# Altium PCB AtMega8.PcbDoc
Units mm, origin at the board's own origin, x right, y up, seen from the top; angles counter-clockwise.
Board outline 35 x 20 mm, 2 copper layers (Top Layer, Bottom Layer); 4 components, 10 nets, 46 pads, 0 vias.
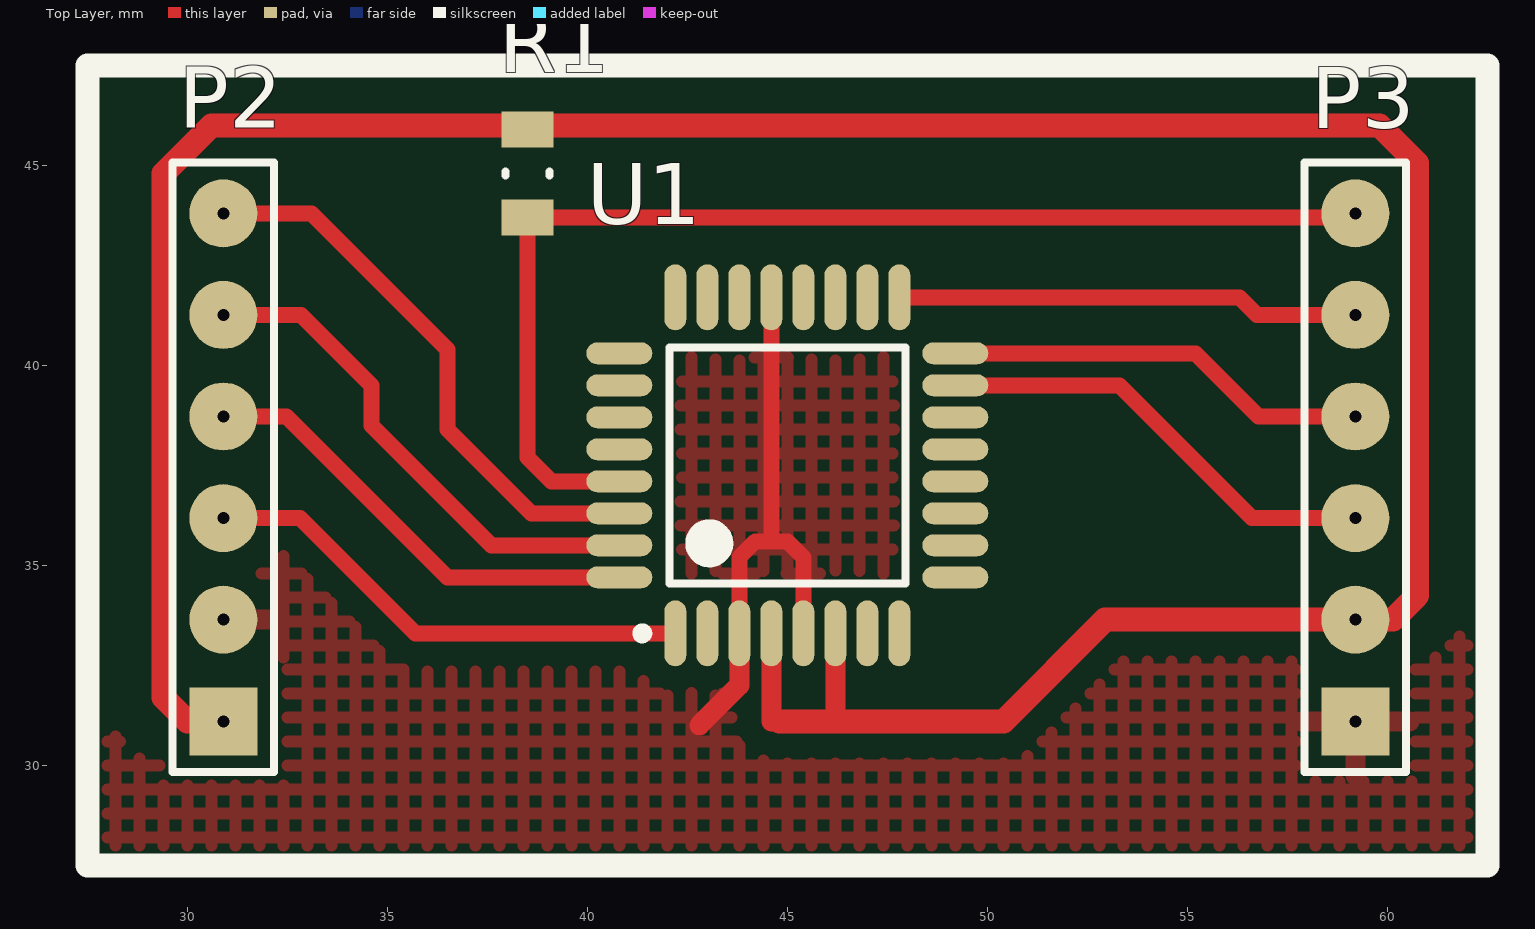
[diagram p0: Top Layer view]
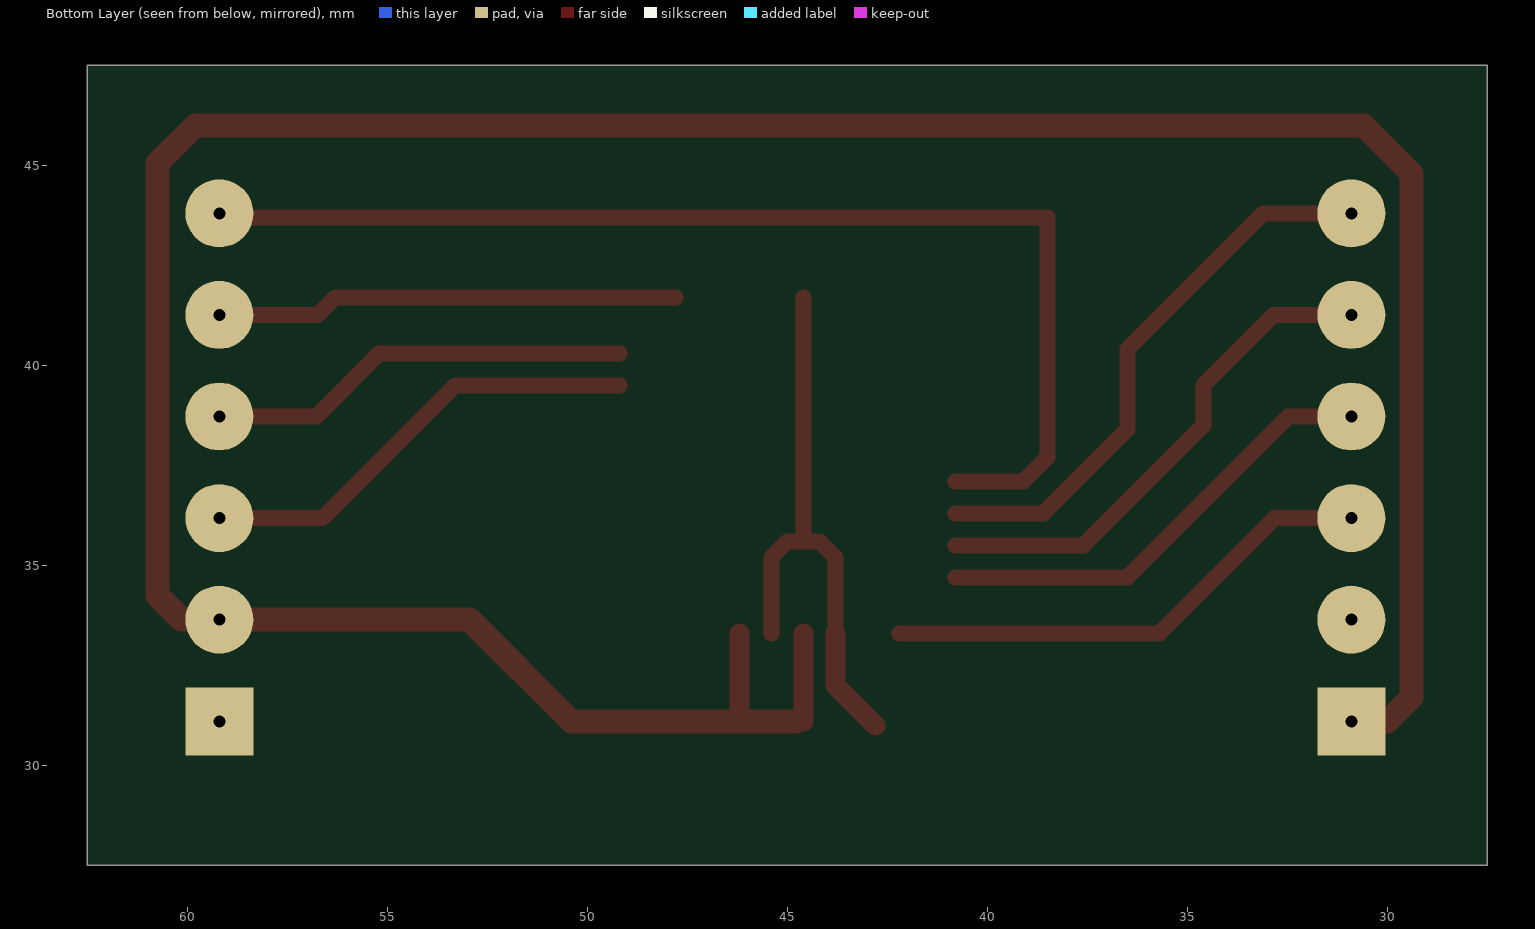
[diagram p1: Bottom Layer view, seen from below]

## Layer stack, top to bottom
Top Solder: solder mask 0.0102, Solder Resist, Dk 3.5
Top Layer: signal copper 0.0356
Dielectric 1: dielectric 0.32, FR-4, Dk 4.8
Bottom Layer: signal copper 0.0356
Bottom Solder: solder mask 0.0102, Solder Resist, Dk 3.5

## Board outline
27.5,27.5 62.5,27.5 62.5,47.5 27.5,47.5

## Design rules (kind name [scope] priority, off if disabled: settings)
Clearance Clearance_1 [InPolygon] p1: gap=0.6
Clearance [All] p2: gap=0.254
PolygonConnect [All] p1: connectstyle=Relief reliefconductorwidth=0.5 reliefentries=4 polygonreliefangle="90 Angle" airgapwidth=0.5
RoutingVias [All] p1: holewidth=0.711 width=1.27 viastyle="Through Hole" minholewidth=0.711 minwidth=1.27 maxholewidth=0.711 maxwidth=1.27
SolderMaskExpansion [All] p1: expansion=0.102
Width [All] p1: maxlimit=0.4 minlimit=0.254 preferedwidth=0.4
30 further rules are at their usual default settings.

## Components (designator, comment, footprint, x,y, rotation, side; value= is the part's Value field where it differs from the comment)
P2 "Header 6" HDR1X6 30.9,31.1 r90 top
P3 "SPI" HDR1X6 59.2,31.1 r90 top
R1 "Resistor" RESC(0805)2112X05N_wave 38.5,44.8 r90 top
U1 "ATmega8-16AU" 32A_N 45,37.5 r90 top

## Footprints (in the part's own frame and the unit in brackets; to place one, negate y for a bottom-side part, rotate by r counter-clockwise, add the part's x,y. Pads: shape width x height; smd on the part's side, far side on the other; paste and mask are expansions set on the pad)
32A_N [mm] "Thin QFP, 32-Leads, Body 7x7mm, Pitch 0.8mm, IPC Medium Density"
  oval 1.65x0.55 smd: 1(-4.2,2.8) 2(-4.2,2) 3(-4.2,1.2) 4(-4.2,0.4) 5(-4.2,-0.4) 6(-4.2,-1.2) 7(-4.2,-2) 8(-4.2,-2.8) 17(4.2,-2.8) 18(4.2,-2) 19(4.2,-1.2) 20(4.2,-0.4) 21(4.2,0.4) 22(4.2,1.2) 23(4.2,2) 24(4.2,2.8)
  oval 0.55x1.65 smd: 9(-2.8,-4.2) 10(-2,-4.2) 11(-1.2,-4.2) 12(-0.4,-4.2) 13(0.4,-4.2) 14(1.2,-4.2) 15(2,-4.2) 16(2.8,-4.2) 25(2.8,4.2) 26(2,4.2) 27(1.2,4.2) 28(0.4,4.2) 29(-0.4,4.2) 30(-1.2,4.2) 31(-2,4.2) 32(-2.8,4.2)
  silkscreen extent -4.32,-2.95 2.95,3.75, body extent -3.5,-3.5 3.5,3.5, height 1.2
HDR1X6 [mm] "Connector; Header; 6 Position"
  rect 1.7x1.7 hole 0.3: 1(0,0)
  round 1.7 hole 0.3: 2(2.54,0) 3(5.08,0) 4(7.62,0) 5(10.16,0) 6(12.7,0)
  silkscreen extent -1.27,-1.27 13.97,1.27
RESC(0805)2112X05N_wave [mm] "Chip Diode, 2-Leads, Body 2,05x1,25mm, IPC Medium Density"
  rect 0.9x1.3 smd: 1(-1.1,0) 2(1.1,0)
  silkscreen extent -0.05,-0.55 0.05,0.55, body extent -1,-0.61 1,0.61, height 0.5

## Part data
P2: "Header, 6-Pin"
P3: library part "Header 6", "Header, 6-Pin"
U1: "8-bit AVR Microcontroller, 4.5-5.5V, 16MHz, 8KB Flash, 512 Bytes EEPROM, 1KB SRAM, 32-pin TQFP, Industrial Grade (-40°C to 85°C)"

## Nets (pads, with @x,y where several pads share a name; then routed paths per layer and width w, separated by ;. In a path a pad name is that pad's centre, name@x,y a point inside that pad or via, vN(x,y) a via of type N, cw(c..) or ccw(c..) an arc to the next point about the centre after c; other vN are vias at no path point)
GND: P2.2 P3.1 U1.3 U1.5 U1.21 | length 14.5
  Top Layer w0.4: U1.3 43.8,35.2 44.2,35.6 45,35.6 45.4,35.2 U1.5 ; 44.6,35.6 U1.21
  Top Layer w0.5: 42.8,31 43.8,32 U1.3
MISO: P3.4 U1.16 | length 10.7
  Top Layer w0.4: U1.16 55.2,40.3 56.78,38.72 P3.4
MOSI: P3.3 U1.15 | length 11.4
  Top Layer w0.4: U1.15 53.3,39.5 56.62,36.18 P3.3
RES: P3.6 R1.1 U1.29 | length 29.3
  Top Layer w0.4: U1.29 39.1,37.1 38.5,37.7 R1.1 59.1,43.7 P3.6
RI: P2.4 U1.32 | length 11.6
  Top Layer w0.4: P2.4 32.48,38.72 36.5,34.7 U1.32
RX: P2.6 U1.30 | length 14.2
  Top Layer w0.4: P2.6 33.1,43.8 36.5,40.4 36.5,38.4 38.6,36.3 U1.30
SCK: P3.5 U1.17 | length 11.6
  Top Layer w0.4: U1.17 56.3,41.7 56.74,41.26 P3.5
SLEEP: P2.3 U1.1 | length 12.5
  Top Layer w0.4: P2.3 32.82,36.18 35.7,33.3 U1.1
TX: P2.5 U1.31 | length 12.9
  Top Layer w0.4: P2.5 32.84,41.26 34.6,39.5 34.6,38.5 37.6,35.5 U1.31
VCC: P2.1 P3.2 R1.2 U1.4 U1.6 | length 79.5
  Top Layer w0.5: 44.6,31.1 U1.4 ; 46.2,31.1 U1.6
  Top Layer w0.6: P2.1 30,31.1 29.4,31.7 29.4,44.8 30.6,46 59.8,46 60.74,45.06 60.74,34.24 60.14,33.64 P3.2 52.94,33.64 50.4,31.1 44.8,31.1
pads on no net: U1.2 U1.7 U1.8 U1.9 U1.10 U1.11 U1.12 U1.13 U1.14 U1.18 U1.19 U1.20 U1.22 U1.23 U1.24 U1.25 U1.26 U1.27 U1.28

## Polygon pours and split planes (outlines as drawn)
GND on Top Layer "Top Layer-No Net" (hatched 90Degree grid 0.6 track 0.3, remove dead copper, pour order 0): 28,47 62,47 62,28 28,28

## Silkscreen, mask and mechanical layers (free items; w line width, h text height)
Top Overlay:
  the board outline again, w0.6